# Altium PCB PCB.PcbDoc (part 5 of 5)
Units mil, origin at the board's own origin, x right, y up, seen from the top; angles counter-clockwise.
Board outline 7500 x 6500 mil, 2 copper layers (Top Layer, Bottom Layer); 229 components, 273 nets, 1476 pads, 506 vias.
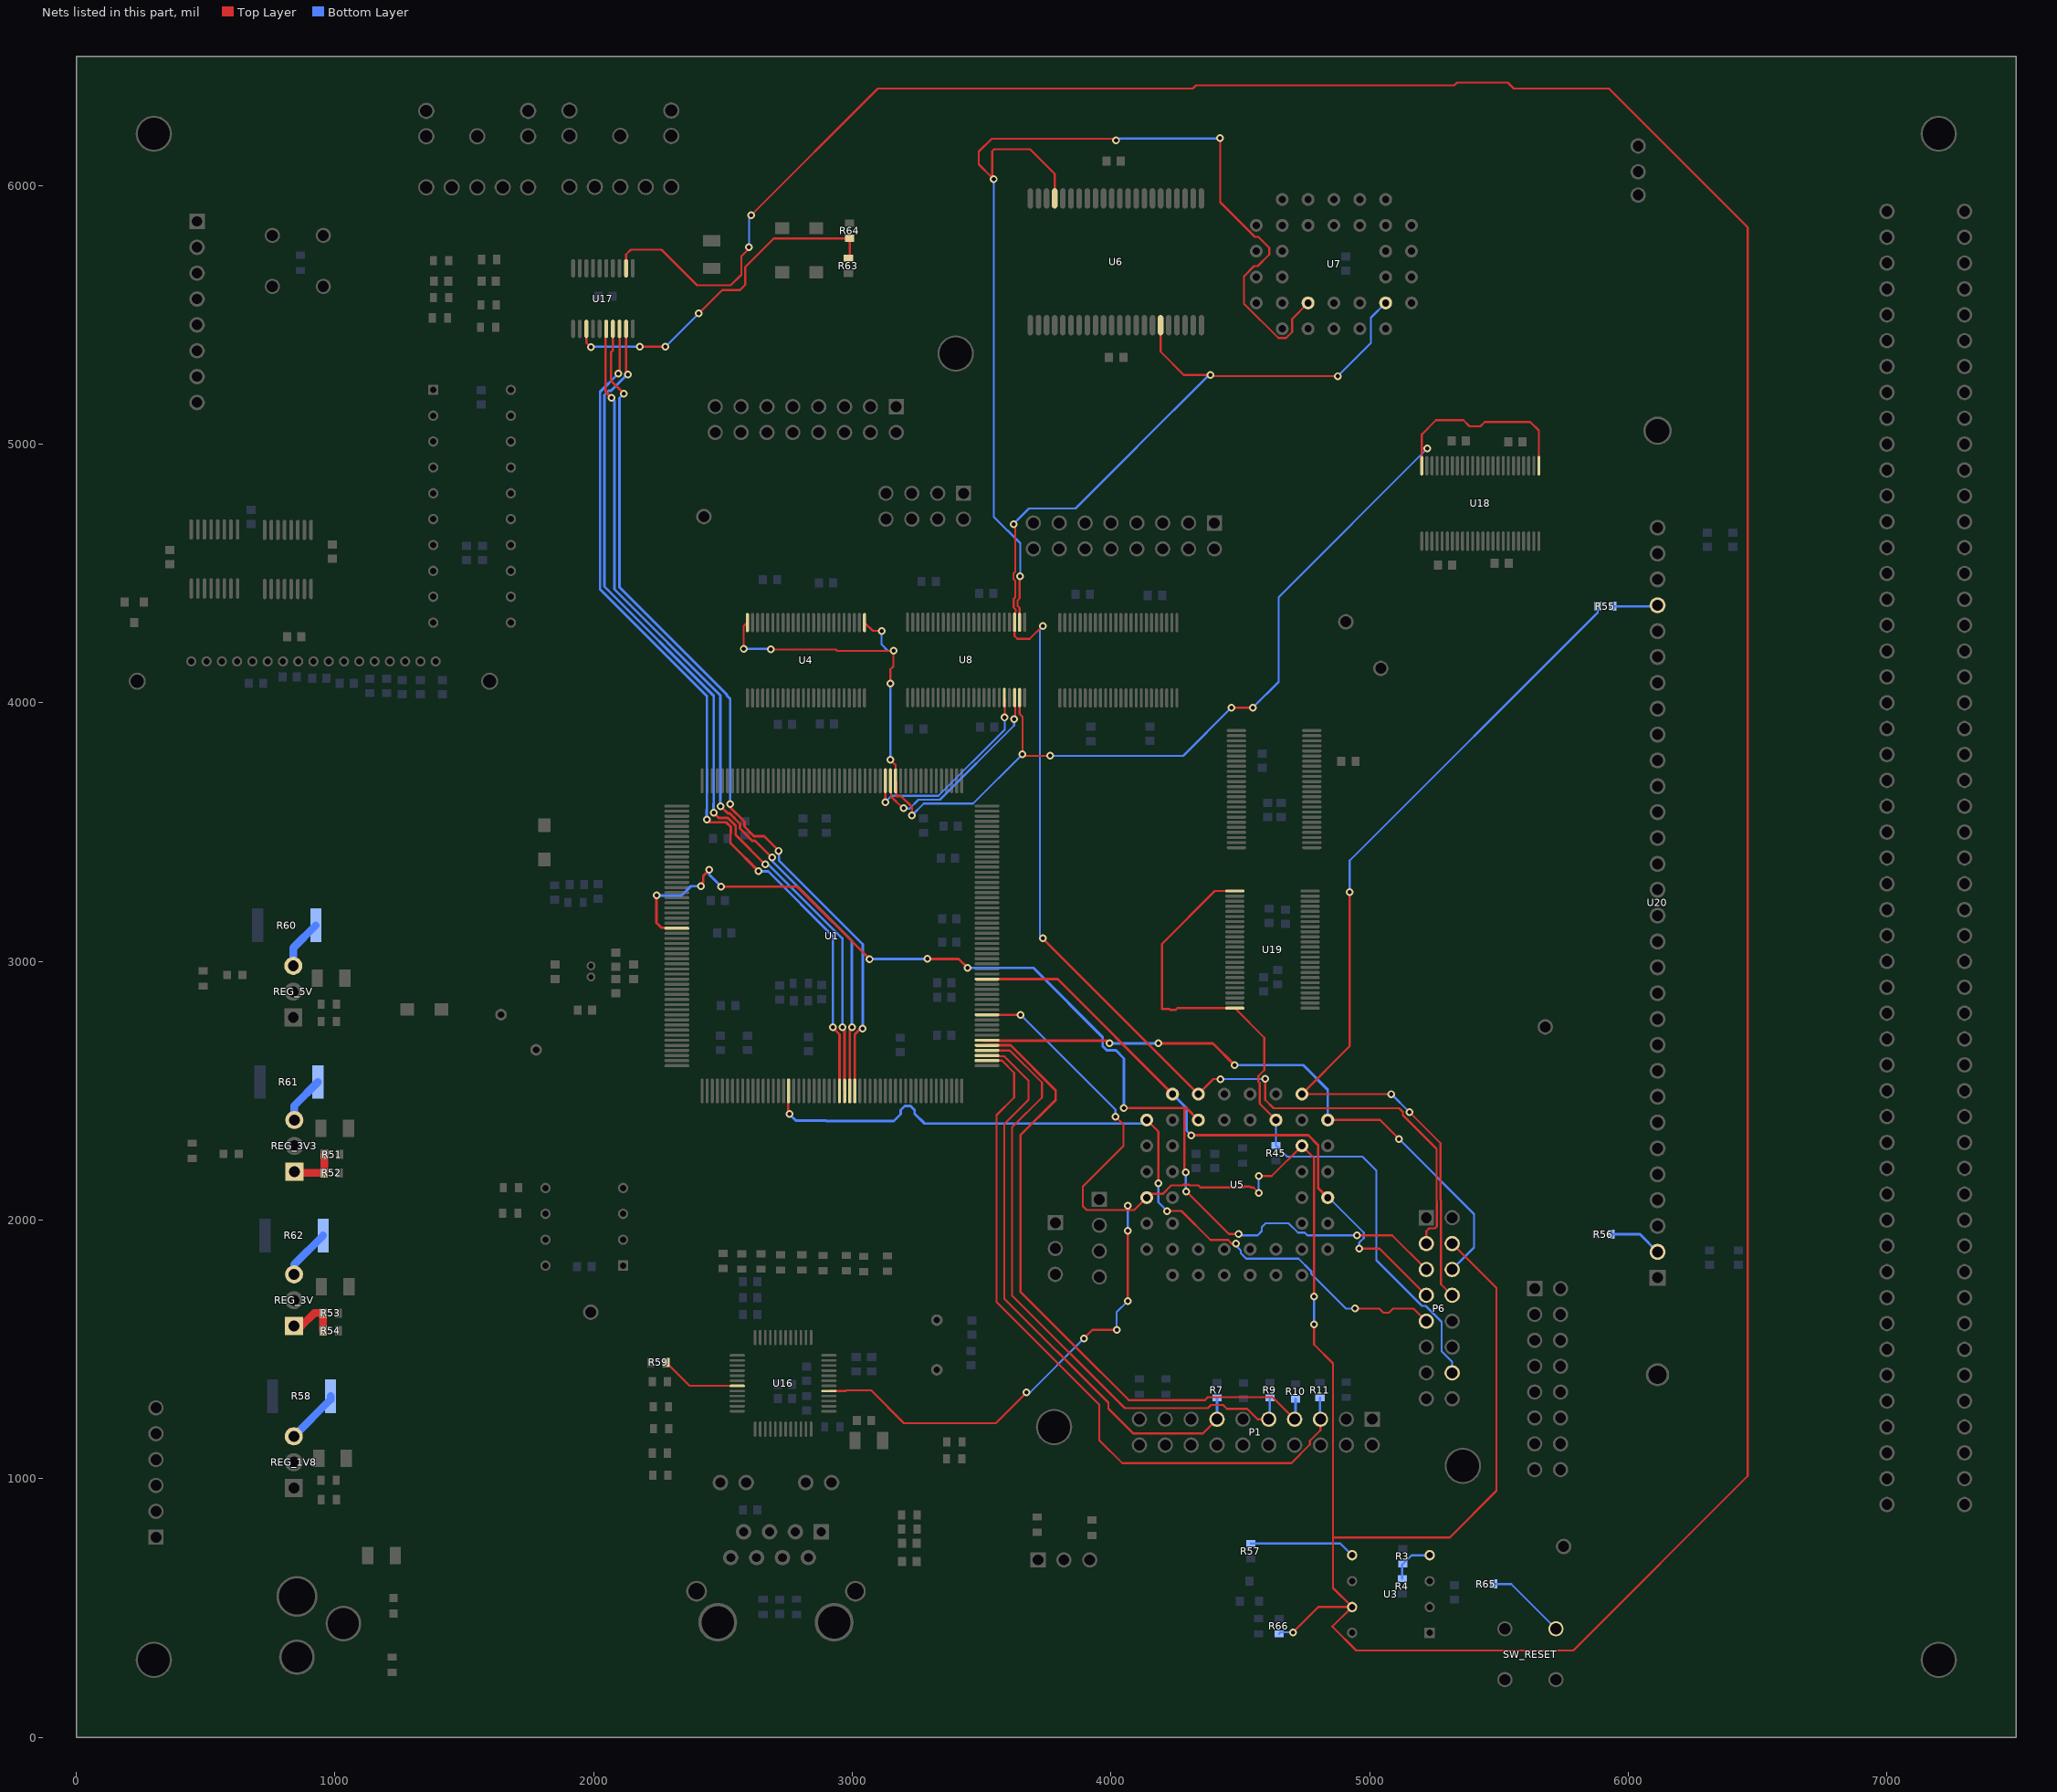
[diagram p5: the nets of this part, all layers, seen from the top]

## Via types
v1: diameter 30, hole 16, Top Layer to Bottom Layer, 500 vias
v2: diameter 30, hole 16, Top Layer to Bottom Layer, tented top, 6 vias

## Nets (pads, with @x,y where several pads share a name; then routed paths per layer and width w, separated by ;. In a path a pad name is that pad's centre, name@x,y a point inside that pad or via, vN(x,y) a via of type N, cw(c..) or ccw(c..) an arc to the next point about the centre after c; other vN are vias at no path point) (continued)
NetR51_1: R51.1 R52.2 REG_3V3.1 | length 190
  Top Layer w10: REG_3V3.1@843,2187 REG_3V3.1@848,2182 ; R52.2@958.47,2182 R52.2@959.47,2183
  Top Layer w30: REG_3V3.1@848,2182 R52.2@958.47,2182 ; R52.2@959.47,2183 R51.1@959.47,2254
NetR53_1: R53.1 R54.2 REG_3V.1 | length 201.2
  Top Layer w30: REG_3V.1@842,1590 870,1590 920,1640 R53.1@954.47,1640 R54.2@954.47,1572
NetR55_1: R55.1 U20.27 | length 174.1
  Bottom Layer w10: R55.1@5940.53,4373 6109,4373 U20.27@6113,4377
NetR56_1: R56.1 U20.2 | length 207.1
  Bottom Layer w10: R56.1@5934.06,1945 6045,1945 U20.2@6113,1877
NetR57_1: R57.1 U3.5 | length 410.9
  Bottom Layer w8: R57.1@4540,749.53 4886.47,749.53 U3.5@4932,704
NetR58_2: R58.2 REG_1V8.3 | length 213.9
  Bottom Layer w30: REG_1V8.3@841,1164 983.2,1306.2 R58.2@983.2,1319
NetR59_1: R59.1 U16.7 | length 313
  Top Layer w8: R59.1@2280,1450 2371.01,1358.99 U16.7@2555.31,1358.99
NetR60_1: R60.1 REG_5V.3 | length 193.1
  Bottom Layer w30: REG_5V.3@839,2983 839,3052.8 R60.1@926.2,3140
NetR61_1: R61.1 REG_3V3.3 | length 184.8
  Bottom Layer w30: REG_3V3.3@843,2387 843,2442.8 R61.1@934.2,2534
NetR62_1: R62.1 REG_3V.3 | length 196.5
  Bottom Layer w30: REG_3V.3@842,1790 842,1827.8 R62.1@954.2,1940
NetR63_1: R63.1 R64.2 U17.13 | length 1372.7
  Top Layer w8: U17.13@1972,5445.75 1972,5392 v1(1989,5375) ; v1(2179,5377) v1(2278,5377) ; v1(2406,5505) 2497,5596 2566.21,5596 2586,5615.79 2586,5685 2696.47,5795.47 R64.2@2990,5795.47 2990,5724.53 R63.1@2985,5719.53
  Bottom Layer w8: v1(1989,5375) 1989,5377 v1(2179,5377) ; v1(2278,5377) v1(2406,5505)
NetR65_1: R65.1 SW_RESET.1 | length 312.1
  Bottom Layer w8: R65.1@5479.53,593 5547,593 SW_RESET.1@5720,420
NetU1_171: U1.171 U8.46 | length 800.4
  Top Layer w8: U1.171@3147.56,3698.23 3150.34,3695.45 3150.34,3637.59 3194.93,3593 v1(3198,3593) ; v1(3626,3937) 3629.94,3940.94 3629.94,4017.22 U8.46@3627.17,4020
  Bottom Layer w8: v1(3198,3593) 3200,3591 3221.79,3591 3255.79,3625 3338.79,3625 3626,3912.21 v1(3626,3937)
NetU1_172: U1.172 U8.44 | length 783.4
  Top Layer w8: v1(3127.87,3616.13) U1.172@3127.87,3698.23 ; U8.44@3587.8,4020 3589,4018.8 v1(3589,3943)
  Bottom Layer w8: v1(3127.87,3616.13) 3151.75,3640 3332.58,3640 3589,3896.42 v1(3589,3943)
NRD: U1.170 U4.1 U4.24 U8.47 U18.1 U18.24 | length 5309.1
  Top Layer w8: v1(2580,4209) 2580,4295.59 U4.24@2594.41,4310 ; v1(2685,4206) 2937,4206 2942,4201 v1(3159,4201) 3159,4141 3147,4129 v1(3147,4075) ; U4.1@3047.17,4310 3079.17,4278 v1(3113,4278) ; v1(3147,3779) 3167.24,3758.76 U1.170@3167.24,3698.23 3170.02,3695.45 3170.02,3639.12 3170.14,3639 3188.77,3639 3231,3596.77 v1(3231,3565) ; U8.47@3646.85,4020 3646.85,3957.15 3658,3946 v1(3658,3801) 3664,3795 v1(3765,3795) ; v1(4465,3981) v1(4548,3981) ; U18.24@5201.58,4916.34 5201.58,4983 ; v1(5223,4983) 5201.58,4983 ; 5654,4955 5654,5053 5621,5086 5445.12,5086 5428.12,5069 5385.88,5069 5362.43,5092.44 5256.44,5092.44 5201.58,5037.58 5201.58,4983
  Bottom Layer w8: v1(2580,4209) 2682,4209 v1(2685,4206) ; v1(3113,4278) 3113,4226 3138,4201 v1(3159,4201) ; v1(3147,3779) v1(3147,4075) ; v1(3231,3565) 3276,3610 3467,3610 v1(3658,3801) ; v1(3765,3795) 4279,3795 v1(4465,3981) ; v1(4548,3981) 4648,4081 4648,4408 v1(5223,4983)
NRD_NOE_3V3_BUF: U6.41 U7.24 U8.2 | length 4507.2
  Top Layer w8: v1(3547,6024) v1@3541,6030 ; U8.2@3646.85,4311.34 3646.85,4366.38 3638.78,4374.45 3638.78,4395.99 3646.85,4404.06 3646.85,4486.85 v1(3649,4489) ; U6.41@3782.53,5950.08 3782.53,6044.47 3687,6140 3549,6140 3541,6132 v1@3541,6030 ; v1(4020,6175) 4014,6181 3538.79,6181 3489,6131.21 3489,6082 v1@3541,6030 ; v1(4422,6184) 4422,5935.09 4556.09,5801 4570,5801 4612,5759 4612,5733 4567,5688 4553.09,5688 4514,5648.91 4514,5543.09 4647.09,5410 4676.91,5410 4700,5433.09 4700,5484 U7.24@4762,5546
  Bottom Layer w8: v1(3547,6024) 3547,4719 3649,4617 v1(3649,4489) ; v1@4015,6180 v1(4020,6175) 4027,6182 4420,6182 v1(4422,6184)
NTRST: P6.6 U1.110 U5.17 | length 2514.8
  Top Layer w8: U5.17@4838,2387 5040,2387 v1(5113,2314)
  Top Layer w10: U1.110@3520.59,2695.28 3504.78,2695.28 3503,2693.5 3984.5,2693.5 v1(3995,2683) ; v1(4183,2683) 4394,2683 v1(4478,2599)
  Bottom Layer w8: v1(5113,2314) 5404,2023 5404,1894 P6.6@5319,1809
  Bottom Layer w10: v1(3995,2683) v1(4183,2683) ; v1(4478,2599) 4743,2599 4838,2504 U5.17@4838,2387
NWAIT: P6.5 U1.25 U5.27 | length 4322.2
  Top Layer w8: v1(4289,2184) 4284,2189 4284,2425 4292,2433 ; v1(4291,2111) 4456,1946 v1(4493,1946) ; v1(4951,1941) 5087,1941 P6.5@5219,1809
  Top Layer w10: v1(2243,3255) 2243,3149.37 2251,3141.37 2262.25,3130.13 2319.99,3130.13 U1.25@2321.77,3128.35 ; v1(2415,3291) 2415,3298 2424,3307 2424,3331 v1(2447,3354) ; v1(2493,3289) 2787,3289 v1(3067,3009) ; v1(3290,3010) 3411,3010 v1(3446,2975) ; v1(4050,2433) 4292,2433 U5.27@4338,2387
  Bottom Layer w8: v1(4289,2184) 4289,2113 v1(4291,2111) ; v1(4493,1946) 4498,1941 4566.79,1941 4583,1957.21 4583,1972.77 4598.23,1988 4686.09,1988 4723.09,1951 4749.21,1951 4759.21,1941 v1(4951,1941)
  Bottom Layer w10: v1(2243,3255) 2340,3255 2376,3291 v1(2415,3291) ; v1(2447,3354) 2447,3335 v1(2493,3289) ; v1(3067,3009) 3068,3010 v1(3290,3010) ; v1(3446,2975) 3700,2975 3968,2707 3968,2671.82 3983.82,2656 4019,2656 4050,2625 v1(4050,2433)
NWE_3V3_BUF: P6.3 U5.26 U6.17 U7.31 U8.3 | length 6347.8
  Top Layer w8: v1(3623,4691) 3629.94,4684.06 3629.94,4506.71 3623,4499.77 3623,4478.23 3629.94,4471.29 3629.94,4408.37 3623.78,4402.2 3623.78,4368.24 3631.85,4360.17 3631.85,4351.74 3629.94,4349.84 3629.94,4314.12 U8.3@3627.17,4311.34 3627.17,4257.83 3638,4247 3686,4247 v1(3736,4297) ; v1(3736,3089) U5.26@4338,2487 4396,2545 v1(4424,2545) ; U6.17@4191.98,5460 4191.98,5357.02 4282,5267 v1(4385,5267) 4389,5263 v1(4877,5263) ; v1(4596,2546) 4596,2465 4629,2432 5114,2432 5128,2418 5128,2406.23 5259,2275.23 5259,2073.02 5259.53,2072.49 5259.53,1974.92 5253.08,1968.47 5231.06,1968.47 5219,1956.42 P6.3@5219,1909
  Bottom Layer w8: v1(3623,4691) 3683,4751 3862.77,4751 4101,4989.23 4101,4990 4378,5267 v1(4385,5267) ; v1(3736,3089) 3725,3100 3725,4286 v1(3736,4297) ; v1(4424,2545) 4595,2545 v1(4596,2546) ; v1(4877,5263) 5005,5391 5005,5489 U7.31@5062,5546
PCK0: P6.7 U1.122 U5.11 U5.28 | length 2413.2
  Top Layer w8: v1(4960,1890) 5038,1890 P6.7@5219,1709
  Top Layer w10: U1.122@3520.59,2931.5 3793.5,2931.5 U5.28@4238,2487 ; v1(4310,2328) 4763,2328 4801,2290 4801,2124 U5.11@4838,2087
  Bottom Layer w8: U5.11@4838,2087 4841.77,2087 4977,1951.77 4977,1930.23 4960,1913.23 v1(4960,1890)
  Bottom Layer w10: U5.28@4238,2487 4292,2433 4292,2346 v1(4310,2328)
PCK1: P6.9 U1.70 U5.29 | length 3151.2
  Top Layer w8: U5.29@4138,2387 4183,2342 v1(4183,2142) ; v1(4217,2035) 4272,2035 4384,1923 4452.91,1923 4466.91,1909 v1(4482.47,1909) ; v1(4943,1658) 5037.23,1658 5053.23,1642 5074.77,1642 5090.77,1658 5170,1658 P6.9@5219,1609
  Top Layer w10: U1.70@2753.86,2499.41 2752.08,2497.63 2752.08,2414.92 v1(2757,2410)
  Bottom Layer w8: v1(4183,2142) 4183,2069 v1(4217,2035) ; v1(4482.47,1909) 4482.47,1902.53 4502,1883 4502,1872.09 4523.09,1851 4724.91,1851 4774,1801.91 4774,1793 4909,1658 v1(4943,1658)
  Bottom Layer w10: v1(2757,2410) 2782,2385 2897.84,2385 2899.84,2383 3160.37,2383 3187,2409.63 3187,2425.18 3202.82,2441 3225.18,2441 3241,2425.18 3241,2411.63 3279.63,2373 4124,2373 U5.29@4138,2387
PFI: R3.1 R4.2 U3.4 | length 175.7
  Bottom Layer w8: R4.2@5126,613.53 5126,668.47 R3.1@5128,670.47 5161.53,704 U3.4@5232,704
RAS: P6.8 R55.2 U5.18 | length 3581
  Top Layer w8: v1(4923,3268) 4923,2672 U5.18@4738,2487 v1(5084,2487) ; v1(5154,2417) 5274,2297 5274,2079.23 5276,2077.23 5276,1752 P6.8@5319,1709
  Bottom Layer w8: v1(4923,3268) 4923,3390 5881.47,4348.47 R55.2@5881.47,4373 ; v1(5084,2487) v1(5154,2417)
RD0: U1.83 U17.17 | length 3408.6
  Top Layer w10: U17.17@2074.36,5445.75 2074.36,5362.36 2067,5355 2067,5245 v1(2117,5195) ; v1(2528,3608) 2528,3595.48 2583,3540.48 2583,3520.82 2619.82,3484 2659.25,3484 v1(2715.62,3427.62) ; U1.83@3009.76,2499.41 3009.76,2717.84 3035.74,2743.82 3038.55,2741 v1(3040,2741)
  Bottom Layer w10: v1(2117,5195) 2100,5178 2100,4447 2515,4032 2515,4028.75 2528,4015.75 v1(2528,3608) ; v1(2715.62,3427.62) 2716.46,3426.79 2716.46,3390.05 3035.74,3070.78 3040,3066.52 v1(3040,2741)
RESET: P6.4 R66.1 U1.115 U3.7 U5.16 U5.35 U16.29 U17.2 | length 19885.1
  Top Layer w8: U17.2@2125.54,5680 2125.54,5733.54 2144,5752 2262,5752 2400,5614 2530,5614 2571,5655 2571,5726 2601,5756 v1(2601,5761) ; v1(2609,5885) 3099,6375 4316.75,6375 4328.75,6387 5327.19,6387 5338.19,6398 5534.12,6398 5557.12,6375 5925,6375 6462,5838 6462,1011 5787,336 4948,336 4856,428 U3.7@4932,504 ; U16.29@2909.64,1339.31 2975.54,1339.31 2978.23,1342 3072.77,1342 3199.77,1215 3555,1215 v1(3674,1334) ; U1.115@3520.59,2793.7 v1(3650.3,2793.7) ; v1(3895,1542) 3929,1576 v1(4022,1576) ; v1(4017,2400) 4048,2369 4048,2287 3891,2130 3891,2054 3906,2039 4065,2039 ; v1(4065,1687) v1(4065,1958) ; v1(4065,2056) 4065,2039 ; v1(4571,2105) 4550,2126 4540.77,2126 4536.77,2130 4515.23,2130 4511.23,2126 4345.46,2126 4337.46,2134 4304.77,2134 4301.77,2137 4280.23,2137 4277.23,2134 4232.98,2134 4199.98,2101 4124,2101 U5.35@4138,2087 4090,2039 4065,2039 ; v1(4571,2170) 4621,2170 U5.16@4738,2287 4785,2240 v1(4785,1705) ; v1(4704,406) 4802,504 U3.7@4932,504 ; v1(4785,1596) 4785,1519 4858,1446 4858,773 ; P6.4@5319,1909 5490,1738 5490,953.23 5309.77,773 4858,773 ; 4858,773 4858,578 U3.7@4932,504
  Bottom Layer w8: v1(2601,5761) 2601,5877 v1(2609,5885) ; v1(3650.3,2793.7) 4017,2427 v1(4017,2400) ; v1(3674,1334) 3687,1334 v1(3895,1542) ; v1(4022,1576) 4022,1644 v1(4065,1687) ; v1(4065,1958) v1(4065,2056) ; v1(4571,2105) v1(4571,2170) ; R66.1@4650,400.47 4655.53,406 v1(4704,406) ; v1(4785,1596) v1(4785,1705)
ROW_ADDR_EN: P6.14 R45.1 U5.21 U19.25 U19.48 | length 2860.3
  Top Layer w8: U19.25@4478.66,3272.17 4401.17,3272.17 4197,3068 4197,2816 4226.23,2816 4229.14,2813.1 4250.68,2813.1 4256.99,2819.41 U19.48@4478.66,2819.41 4593,2705.07 4593,2579.77 4570,2556.77 4570,2535.23 4575,2530.23 4575,2450 U5.21@4638,2387
  Bottom Layer w8: U5.21@4638,2387 R45.1@4638,2288.53 4681.06,2245.47 4972.16,2245.47 5026,2191.63 5026,1844.69 5202.21,1668.47 5216.84,1668.47 5278.47,1606.84 5278.47,1492.21 5319,1451.69 P6.14@5319,1409
TCK: P1.9 R9.1 U1.108 | length 2419.7
  Top Layer w8: U1.108@3520.59,2655.91 3609.09,2655.91 3733,2532 3733,2474.23 3618,2359.23 3618,1708.23 4053.23,1273 4374.47,1273 4387,1285.53 4433,1285.53 4448,1270.53 4526.79,1270.53 4567.31,1230 P1.9@4610,1230
  Bottom Layer w10: P1.9@4610,1230 4614,1234 R9.1@4614,1312.47
TD0: U1.82 U17.16 | length 3357.2
  Top Layer w10: U17.16@2048.77,5445.75 2046,5442.98 2046,5202.32 v1(2069,5179.32) ; v1(2490.46,3600.46) 2518.92,3572 2526.27,3572 2566,3532.27 2566,3513.77 2612.77,3467 2623.92,3467 v1(2689.46,3401.46) ; U1.82@2990.08,2499.41 2990.08,2736.34 v1(2998.74,2745)
  Bottom Layer w10: v1(2069,5179.32) 2080.32,5168 2080.32,4438.85 2490.46,4028.7 2490.46,3638.64 2489.62,3637.81 2489.62,3601.3 v1(2490.46,3600.46) ; v1(2689.46,3401.46) 2689.46,3389.22 2998.74,3079.94 v1(2998.74,2745)
TDI: P1.5 R11.1 U1.106 | length 2817
  Top Layer w8: U1.106@3520.59,2616.54 3578.46,2616.54 3626,2569 3626,2474.23 3558,2406.23 3558,1683.38 3955,1286.38 3955,1148.79 4043.79,1060 4697.31,1060 4769.47,1132.16 4769.47,1146.79 4810,1187.31 P1.5@4810,1230
  Bottom Layer w10: R11.1@4808,1312.47 4808,1232 P1.5@4810,1230
TDO: P1.13 R7.1 U1.107 | length 2239
  Top Layer w8: U1.107@3520.59,2636.22 3523.37,2633.44 3586.72,2633.44 3681,2539.16 3681,2464.66 3588,2371.66 3588,1695.8 3990,1293.8 3990,1271.47 4087,1174.47 4354.47,1174.47 P1.13@4410,1230
  Bottom Layer w10: P1.13@4410,1230 R7.1@4410,1312.47
TF0: U1.80 U17.18 | length 3421.4
  Top Layer w10: v1(2095,5272) 2101,5278 2101,5444.7 U17.18@2099.95,5445.75 ; v1(2438.13,3548.13) 2448.27,3538 2512.18,3538 2530,3520.18 2530,3494.64 2529.93,3494.56 2529.93,3456.34 v1(2637.13,3349.13) ; v1(2924.74,2745) 2924.74,2743.82 2950.71,2717.84 U1.80@2950.71,2499.41
  Bottom Layer w10: v1(2095,5272) 2025,5202 2025,4438.49 2438.13,4025.35 2438.13,3586.32 2437.3,3585.48 2437.3,3548.97 v1(2438.13,3548.13) ; v1(2637.13,3349.13) 2637.97,3348.3 2674.7,3348.3 2924.74,3098.26 v1(2924.74,2745)
TK0: U1.81 U17.19 | length 3413.6
  Top Layer w10: U17.19@2125.54,5445.75 2125.54,5281.46 2135,5272 v1(2132,5269) ; v1(2464.3,3574.3) 2483.59,3555 2519.23,3555 2549,3525.23 2549,3489.59 v1(2663.3,3375.3) ; v1(2961.74,2745) 2970.39,2736.34 U1.81@2970.39,2499.41
  Bottom Layer w10: v1(2132,5269) 2122,5269 2122,5260.82 2067.5,5206.32 2057.82,5206.32 2042,5190.5 2042,4449.32 2464.3,4027.03 2464.3,3612.48 2463.46,3611.64 2463.46,3575.13 v1(2464.3,3574.3) ; v1(2663.3,3375.3) 2675.54,3375.3 2961.74,3089.1 v1(2961.74,2745)
TMS: P1.7 R10.1 U1.109 | length 2526.3
  Top Layer w8: 3854.5,1518.5 4069,1304 4363.05,1304 4374.57,1315.53 4624.47,1315.53 P1.7@4710,1230
  Top Layer w10: U1.109@3520.59,2675.59 3612.04,2675.59 3786,2501.63 3786,2464.37 3650,2328.37 3650,1723 3843.87,1529.13 3854.5,1518.5
  Bottom Layer w10: P1.7@4710,1230 4714,1234 R10.1@4714,1308.47
pads on no net: J1. J1.7 J2. J2.B J2.C J3. J3.B J3.C J4.SWITCH P1.2 P5.1 P5.3 P5.5 P5.7 P5.9 P5.11 P5.13 P6.11 P6.13 P6.15 SW_HangUp.3 SW_HangUp.4 SW_RESET.3 SW_RESET.4 U1.2 U1.15 U1.16 U1.17 U1.18 U1.21 U1.22 U1.23 U1.24 U1.42 U1.61 U1.64 U1.65 U1.66 U1.67 U1.68 U1.69 U1.73 U1.74 U1.77 U1.78 U1.79 U1.84 U1.85 U1.86 U1.87 U1.88 U1.89 U1.90 U1.91 U1.102 U1.103 U1.104 U1.118 U1.119 U1.120 U1.121 U1.123 U1.124 U1.125 U1.126 U1.127 U1.128 U1.144 U1.158 U1.159 U1.160 U1.161 U1.162 U1.163 U1.173 U1.174 U1.175 U1.176 U1.177 U1.178 U1.201 U1.202 U1.203 U1.204 U1.205 U1.206 U1.207 U1.208 U3.6 U3.8 U5.2 U5.3 U5.4 U5.5 U5.6 U5.7 U5.8 U5.9 U5.10 U5.42 U5.43 U5.44 U6.22 U6.23 U6.28 U8.6 U8.43 U9.12 U9.13 U9.14 U11.3 U11.4 U11.5 U11.6 U11.12 U13.1 U16.8 U16.9 U16.10 U16.11 U16.12 U16.25 U18.13 U18.14 U18.16 U18.17 U18.19 U18.20 U18.22 U18.23 U18.26 U18.27 U18.29 U18.30 U18.32 U18.33 U18.35 U18.36 U19.16 U19.17 U19.19 U19.20 U19.22 U19.23 U20. U20.19 U20.24 U20.26 U20.28 U20.29 U21.16 U21.17 U21.19 U21.20 U21.22 U21.23

## Polygon pours and split planes (outlines as drawn)
GNDPLL on Bottom Layer "Bottom Layer-GNDPLL" (solid, remove dead copper, pour order 4): 2519,2763 2979,2772 2951,3005 2902,3005 2883,3010 2508,2999
GNDPLL on Bottom Layer "Bottom Layer-GNDPLL" (solid, remove dead copper, pour order 6): 1775,3152 2264,3016 2264,3332 1776,3348 1775,3349
GND on Bottom Layer "Bottom Layer - GND" (solid, remove dead copper, pour order 0): 2161,203 2165,199 2980,199 2980,202 3328,550 3328,1143 3362,1143 3613,1394 3613,1783 3512,1783 3229,2066 2319,2066 2183,1930 2183,1457 2161,1360 2161,1283
GND on Top Layer "Top Layer-GND" (solid, remove dead copper, pour order 8): 2855,1438 2863,1446 2863,1538 3126,1538 3192,1604 3192,1689 3281,1778 3465,1778 3520,1723 3520,1305 3484,1269 3112,1269 2996,1385 2891,1385 2854,1422
GNDOSC on Top Layer "Top Layer-GNDOSC" (solid, remove dead copper, pour order 2): 1827,2463 1816,2474 1691,2474 1626,2539 1626,2608 1510,2724 1510,2974 1635,3137 2171,3137 2272,3019 2268,2897 2100,2735

## Keep-outs
Keep-Out Layer:
  the board outline again, w10

## Silkscreen, mask and mechanical layers (free items; w line width, h text height)
Top Overlay:
  text "EE 52 Will Werst Rev. 1.0" at 6167,6404 h80 r180
  text "GND" at 5988,6187 h60 r180
  text "3V3" at 5988,6087 h60 r180
  text "5V" at 5988,5997 h60 r180
  text "1" at 3200,5230 h60 r90
  text "15" at 2500,5220 h60 r90
  text "13" at 2600,5220 h60 r90
  text "11" at 2700,5220 h60 r90
  text "9" at 2800,5220 h60 r90
  text "7" at 2900,5220 h60 r90
  text "5" at 3000,5220 h60 r90
  text "3" at 3100,5220 h60 r90
  text "Data" at 3303,4992 h60 r90
  text "2" at 3100,4940 h60 r90
  text "0" at 3200,4940 h60 r90
  text "8" at 2800,4930 h60 r90
  text "6" at 2900,4930 h60 r90
  text "4" at 3000,4930 h60 r90
  text "1" at 3460,4890 h60 r90
  text "14" at 2500,4880 h60 r90
  text "12" at 2600,4880 h60 r90
  text "10" at 2700,4880 h60 r90
  text "3" at 3360,4880 h60 r90
  text "7" at 3160,4875 h60 r90
  text "5" at 3260,4875 h60 r90
  text "8" at 4030,4780 h60 r90
  text "6" at 4130,4780 h60 r90
  text "4" at 4230,4780 h60 r90
  text "2" at 4330,4780 h60 r90
  text "0" at 4430,4780 h60 r90
  text "14" at 3730,4770 h60 r90
  text "12" at 3830,4770 h60 r90
  text "10" at 3930,4770 h60 r90
  text "GND" at 2378,4750 h60 r180
  text "CS" at 3560,4716 h60 r90
  text "6" at 3160,4590 h60 r90
  text "4" at 3260,4590 h60 r90
  text "2" at 3360,4590 h60 r90
  text "0" at 3460,4590 h60 r90
  text "1" at 4430,4490 h60 r90
  text "9" at 4030,4480 h60 r90
  text "7" at 4130,4480 h60 r90
  text "5" at 4230,4480 h60 r90
  text "3" at 4330,4480 h60 r90
  text "Address" at 4560,4460 h60 r90
  text "11" at 3930,4450 h60 r90
  text "15" at 3730,4430 h60 r90
  text "13" at 3830,4430 h60 r90
  text "GND" at 4858,4347 h60 r180
  text "5V" at 4989,4165 h60 r180
  text "GND" at 5636,2777 h60 r180
  text "CS2" at 5140,2030 h40 r180
  text "JTAG_NTRST" at 5770,2030 h40 r180
  text "RUN" at 3719,2017 h60 r180
  text "NWE" at 5140,1930 h40 r180
  text "RST" at 5490,1930 h40 r180
  text "NWAIT" at 5140,1830 h40 r180
  text "NTRST" at 5570,1820 h40 r180
  text "PRG" at 3721,1812 h60 r180
  text "PCK0" at 5140,1730 h40 r180
  text "RAS" at 5490,1730 h40 r180
  text "GND" at 1946,1679 h60 r180
  text "PCK1" at 5140,1630 h40 r180
  text "CAS" at 5490,1630 h40 r180
  text "DRMWE" at 5570,1530 h40 r180
  text "SCLK" at 3989,1488 h60 r90
  text "RAE" at 5490,1430 h40 r180
  text "CAE" at 5490,1330 h40 r180
  text "12V" at 237,1305 h60 r180
  text "TDO" at 4440,1300 h60 r90
  text "TCK" at 4640,1300 h60 r90
  text "TMS" at 4740,1300 h60 r90
  text "TDI" at 4840,1300 h60 r90
  text "3V3" at 5042,1298 h60 r90
  text "5V" at 235,1207 h60 r180
  text "3V3" at 242,1107 h60 r180
  text "JTAG" at 4235,1059 h60 r180
  text "3V" at 240,1004 h60 r180
  text "1V8" at 239,905 h60 r180
  text "GND" at 4739,904 h60 r90
  text "GND" at 4636,903 h60 r90
  text "GND" at 4537,902 h60 r90
  text "GND" at 4841,902 h60 r90
  text "GND" at 241,805 h60 r180
  text "5V" at 5702,771 h60 r180
  text "PWR" at 1213,138 h60 r180
Bottom Overlay:
  text "1" at 3140,5230 h60 r270
  text "15" at 2440,5220 h60 r270
  text "13" at 2540,5220 h60 r270
  text "11" at 2640,5220 h60 r270
  text "9" at 2740,5220 h60 r270
  text "7" at 2840,5220 h60 r270
  text "5" at 2940,5220 h60 r270
  text "3" at 3040,5220 h60 r270
  text "Data" at 3251,4990 h60 r270
  text "2" at 3040,4940 h60 r270
  text "0" at 3140,4940 h60 r270
  text "8" at 2740,4930 h60 r270
  text "6" at 2840,4930 h60 r270
  text "4" at 2930,4930 h60 r270
  text "14" at 2440,4880 h60 r270
  text "12" at 2540,4880 h60 r270
  text "10" at 2640,4880 h60 r270
  text "7" at 3100,4880 h60 r270
  text "5" at 3200,4880 h60 r270
  text "3" at 3300,4880 h60 r270
  text "1" at 3400,4880 h60 r270
  text "14" at 3670,4770 h60 r270
  text "12" at 3770,4770 h60 r270
  text "10" at 3870,4770 h60 r270
  text "8" at 3970,4770 h60 r270
  text "6" at 4070,4770 h60 r270
  text "4" at 4170,4770 h60 r270
  text "2" at 4270,4770 h60 r270
  text "0" at 4370,4770 h60 r270
  text "CS" at 3500,4716 h60 r270
  text "Address" at 4490,4460 h60 r270
Mechanical 3:
  lines w50: -30,150 -30,-30 140,-30 ; -30,6360 -30,6530 150,6530 ; 7350,-30 7530,-30 7530,140

## Text inside footprints (layer, text, board x,y; h text height)
J4: Top Overlay "Face" at 783,60 h40
P1: Top Overlay "1" at 5110,1250 h50 r180; Top Overlay "2" at 5110,1150 h50 r180; Top Overlay "19" at 4050,1250 h50 r180; Top Overlay "20" at 4050,1150 h50 r180
P5: Top Overlay "1" at 5618,1835 h50 r270; Top Overlay "2" at 5718,1835 h50 r270; Top Overlay "16" at 5718,975 h50 r270; Top Overlay "15" at 5618,975 h50 r270